# Altium PCB PCB_OPL2 MegaMod_2023-11-26.pcbdoc
Units mil, origin at the board's own origin, x right, y up, seen from the top; angles counter-clockwise.
Board outline 4277 x 4282.82 mil, 2 copper layers (Top Layer, Bottom Layer); 70 components, 60 nets, 220 pads, 2 vias.
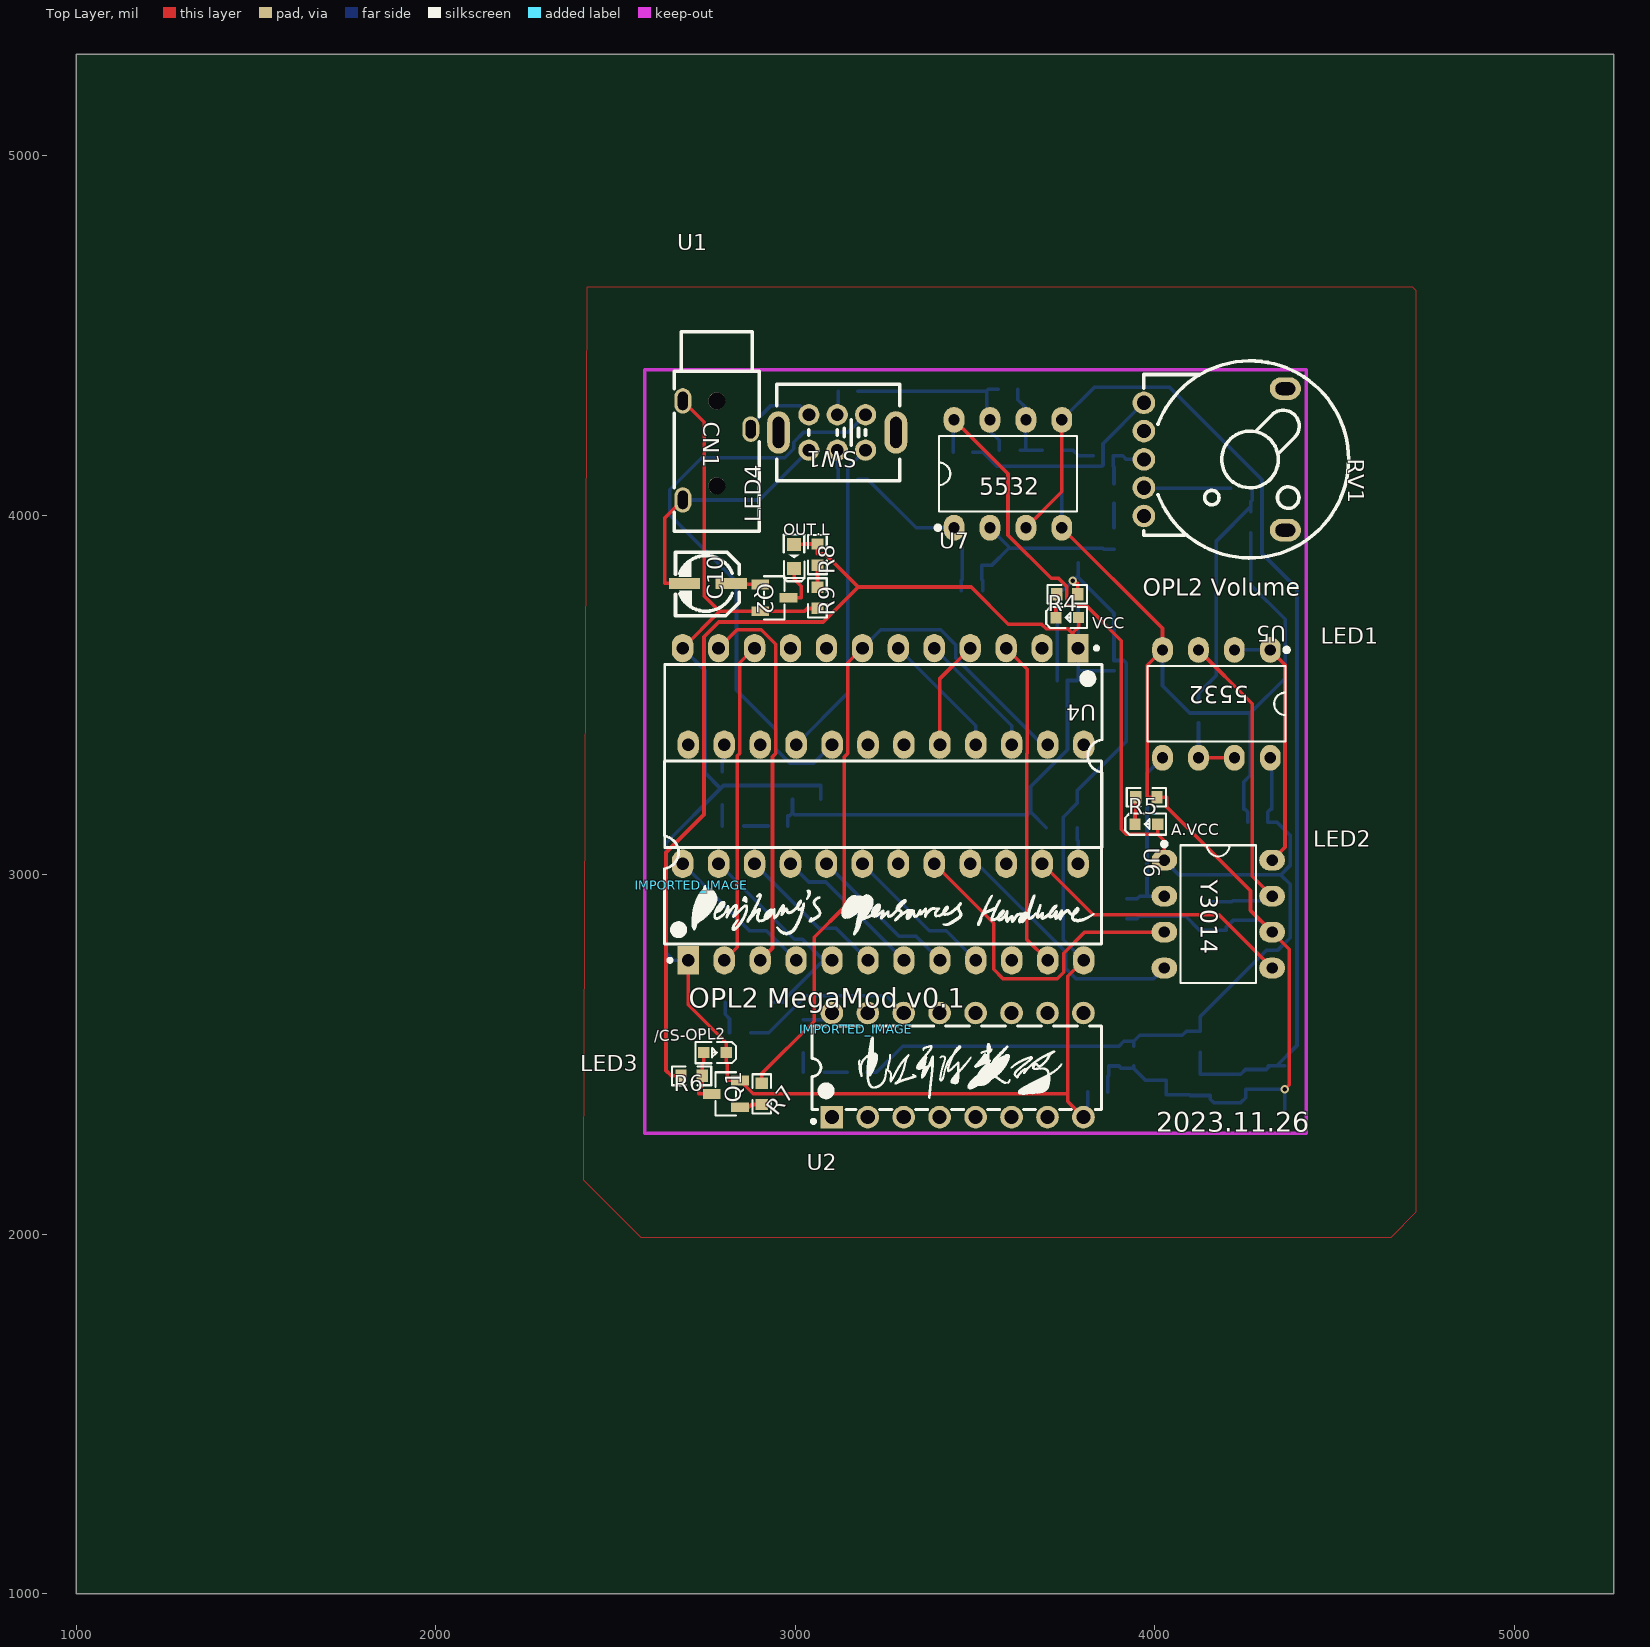
[diagram p0: Top Layer view]
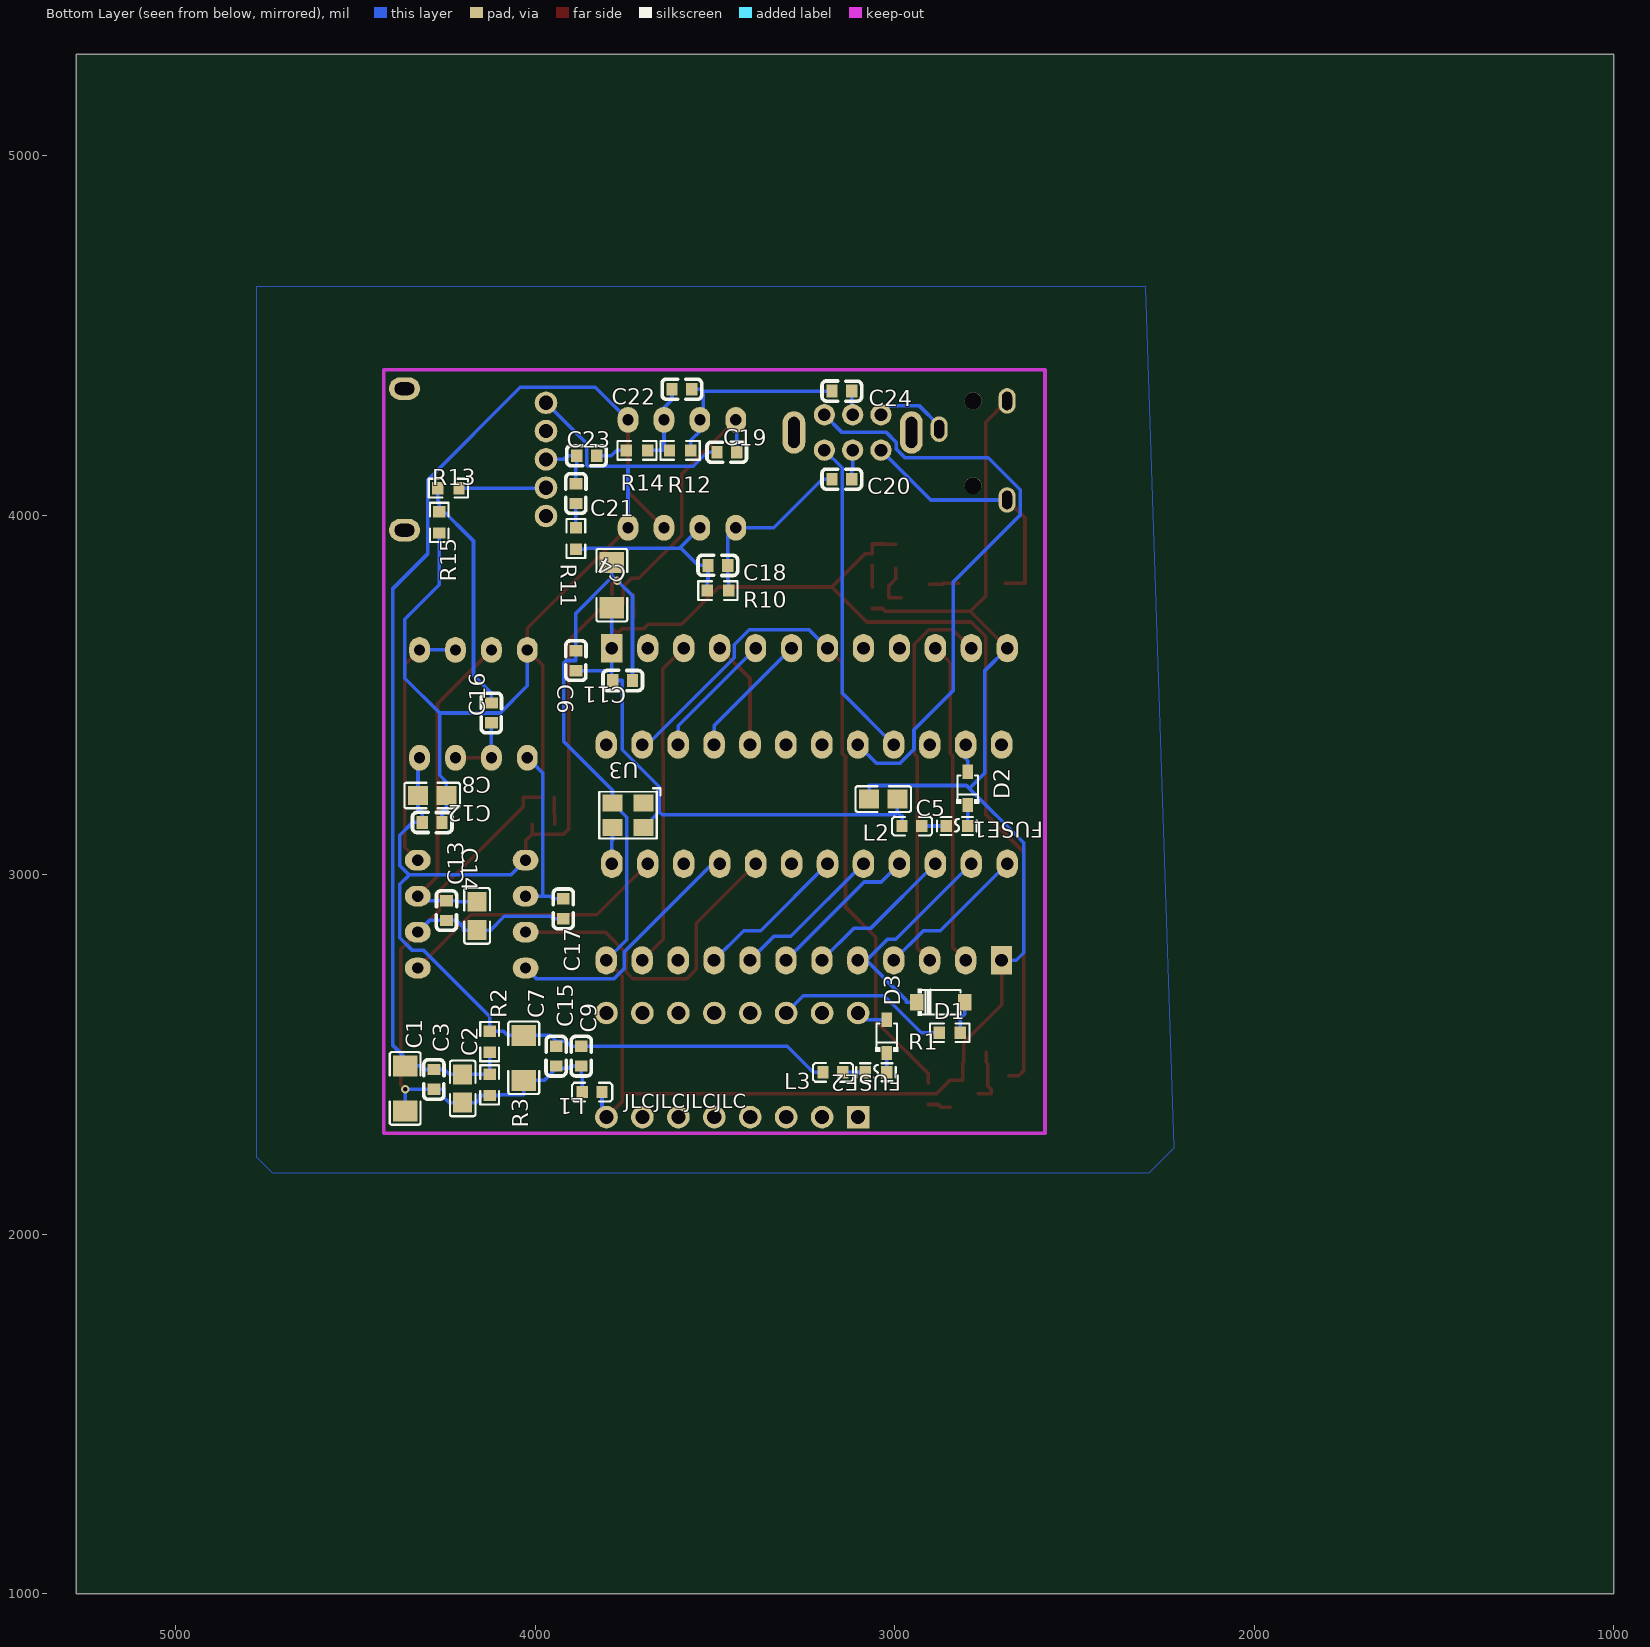
[diagram p1: Bottom Layer view, seen from below]

## Layer stack, top to bottom
Top Layer: signal copper (thickness not stored)
Dielectric: dielectric 12.6, FR-4, Dk 4.8
Bottom Layer: signal copper (thickness not stored)

## Board outline
5277,1000 1000,1000 1000,5282.82 5277,5282.82

## Components (designator, comment, footprint, x,y, rotation, side; value= is the part's Value field where it differs from the comment)
C1 "100u" C1206 4362,2405.72 r270 bottom
C2 "47u" C0805 4202,2405.72 r270 bottom
C3 "1n" C0603 4282,2430.72 r270 bottom
C4 "100u" C1206 3787,3805.72 r90 bottom
C5 "47u" C0805 3032,3210.72 r0 bottom
C6 "1n" C0603 3887,3595.72 r90 bottom
C7 "100u" C1206 4032,2490.72 r270 bottom
C8 "47u" C0805 4287,3220.72 r180 bottom
C9 "1n" C0603 3872,2495.72 r270 bottom
C10 "1u" CAP-D4.0×H5.5 2822,3810.72 r0 top
C11 "0.1u" C0603 3757,3540.72 r180 bottom
C12 "0.1u" C0603 4287,3145.72 r180 bottom
C13 "0.1u" C0603 4247,2900.72 r270 bottom
C14 "10u" C0805 4162,2885.72 r90 bottom
C15 "0.1u" C0603 3942,2495.72 r270 bottom
C16 "4.7u" C0603 4122,3450.72 r270 bottom
C17 "1n" C0603 3922,2905.72 r270 bottom
C18 "120p" C0603 3492,3860.72 r0 bottom
C19 "0.1u" C0603 3467,4175.73 r0 bottom
C20 "4.7u" C0603 3147,4100.73 r0 bottom
C21 "4.7u" C0603 3887,4060.72 r90 bottom
C22 "120p" C0603 3592,4350.73 r0 bottom
C23 "4.7u" C0603 3857,4165.73 r0 bottom
C24 "4.7u" C0603 3147,4345.73 r0 bottom
CN1 "PJ-320" AUDIO-TH_HOOYA_PJ-320 2782,4180.73 r270 top
D1 "1N4148W" SOD-123_L2.8-W1.8-LS3.7-RD 2872,2645.72 r0 bottom
D2 "1N5819WS" SOD-323_L1.8-W1.3-LS2.5-RD 2797,3240.72 r270 bottom
D3 "1N5819WS" SOD-323_L1.8-W1.3-LS2.5-RD 3022,2550.72 r270 bottom
FUSE1 "PPTC0.5A/24V 自恢复保险丝-0603" F0603 2827,3135.72 r180 bottom
FUSE2 "PPTC0.5A/24V 自恢复保险丝-0603" F0603 3052,2450.72 r180 bottom
IMPORTED_IMAGE "IMPORTED_IMAGE" IMPORTED_IMAGE 3169.49,2570.92 r0 top
IMPORTED_IMAGE "IMPORTED_IMAGE" IMPORTED_IMAGE 2712.05,2970.72 r0 top
L1 "100Ω" L0603 3842,2395.72 r180 bottom
L2 "100Ω" L0603 2952,3135.72 r180 bottom
L3 "100Ω" L0603 3172,2450.72 r180 bottom
LED1 "LED0603" LED0603-RD 3757,3715.72 r0 top
LED2 "LED0603" LED0603-RD 3977,3140.72 r0 top
LED3 "LED0603" LED0603-RD 2777,2505.72 r180 top
LED4 "LED-0603_R" LED0603_RED 2997,3885.72 r270 top
Q1 "MMBT3904" SOT-23-3_L2.9-W1.3-P1.90-LS2.4-BR 2807,2390.72 r0 top
Q2 "MMBT3904" SOT-23-3_L2.9-W1.3-P1.90-LS2.4-BR 2942,3770.72 r180 top
R1 "1k" R0603#1 2847,2560.72 r0 bottom
R2 "100k" R0603#1 4127,2535.72 r270 bottom
R3 "100k" R0603#1 4127,2415.72 r270 bottom
R4 "20k" R0603#2 3757,3780.72 r0 top
R5 "20k" R0603#2 3977,3215.72 r0 top
R6 "680r" R0603#2 2712,2440.72 r0 top
R7 "100r" R0603#2 2907,2390.72 r90 top
R8 "10k" R0603#2 3062,3890.72 r90 top
R9 "10k" R0603#2 3062,3770.72 r90 top
R10 "100k" R0603#1 3492,3790.72 r0 bottom
R11 "100k" R0603#1 3887,3935.72 r90 bottom
R12 "100k" R0603#1 3597,4180.73 r0 bottom
R13 "2.2k" R0603#1 4242,4075.72 r0 bottom
R14 "100k" R0603#1 3717,4180.73 r0 bottom
R15 "2.2k" R0603#1 4267,3980.72 r270 bottom
RV1 "圆盘双联电位器10K" RES-TH_RK10J12E002L 4167,4155.73 r270 top
SW1 "SS-22D07" SW-TH_SS-22D07 3117,4230.73 r180 top
U1 "MegaGRRL IC-FM" MEGAGRRL_IC-FM 3231.92,3060.32 r0 top
U2 "MegaGRRL_IC-DCSG" MEGAGRRL_IC-DCSG 3452,2470.72 r0 top
U3 "3.579545MHz" OSC-SMD_4P-L3.2-W2.5-BL 3742,3165.72 r180 bottom
U4 "YM3812-DJ" DIP-24_L31.0-W13.5-P2.54-LS15.2-BL 3237,3330.72 r180 top
U5 "NE5532-DJ" DIP-8-DJ 4172,3475.72 r180 top
U6 "YM3014" DIP-8-DJ 4177,2890.72 r270 top
U7 "NE5532-DJ" DIP-8-DJ 3592,4115.73 r0 top
? "" ? 2649.99,2686.49 r0 top
? "" ? 2103.09,4050 r0 top
? "" ? 2584.57,3688.33 r0 top
? "" ? 2902.67,2132.07 r0 top
? "" ? 2918.25,2112.34 r0 top

## Footprints (in the part's own frame and the unit in brackets; to place one, negate y for a bottom-side part, rotate by r counter-clockwise, add the part's x,y. Pads: shape width x height; smd on the part's side, far side on the other; paste and mask are expansions set on the pad)
AUDIO-TH_HOOYA_PJ-320 [mm]
  oval 1.8x1.2 hole 0.7 slot 1.3 at 0 deg paste+0 mask+0.05: 2(-1.5,2.4) 3(-3.5,-2.4) 4(3.5,-2.4)
  round 1.2 hole 1.2 unplated paste+0: ""(-3.5,0) ""(2.5,0)
  silkscreen extent -8.4,-3.01 5.7,3.01
C0603 [mm]
  rect 0.8x0.9 smd paste+0 mask+0.051: 1(0.7,0) 2(-0.7,0)
  silkscreen extent -1.39,-0.72 1.41,0.71
C0805 [mm]
  rect 1.41x1.35 smd paste-100 mask+0.051: 1(1,0) 2(-1,0)
  silkscreen extent -1.96,-0.9 1.96,0.9
C1206 [mm]
  rect 1.485x1.728 smd paste-100 mask+0.051: 1(1.593,0) 2(-1.593,0)
  silkscreen extent -2.56,-1.09 2.56,1.09
CAP-D4.0×H5.5 [mm]
  rect 2.2x0.8 smd paste+0 mask+0.102: 1(0,0) 2(-3.302,0)
  silkscreen extent -3.94,-2.29 0.56,2.21
DIP-8-DJ [mm]
  oval 1.46x1.825 hole 0.8 paste+0 mask+0.051: 1(-3.81,-3.81) 2(-1.27,-3.81) 3(1.27,-3.81) 4(3.81,-3.81) 5(3.81,3.81) 6(1.27,3.81) 7(-1.27,3.81) 8(-3.81,3.81)
  silkscreen extent -5.1,-3.96 4.87,2.67
DIP-24_L31.0-W13.5-P2.54-LS15.2-BL [mm]
  rect 1.5x2 hole 0.9 paste+0 mask+0.051: 1(-13.97,-7.62)
  oval 1.5x2 hole 0.9 paste+0 mask+0.051: 2(-11.43,-7.62) 3(-8.89,-7.62) 4(-6.35,-7.62) 5(-3.81,-7.62) 6(-1.27,-7.62) 7(1.27,-7.62) 8(3.81,-7.62) 9(6.35,-7.62) 11(11.43,-7.62)
  oval 1.524x2 hole 0.9 paste+0 mask+0.051: 10(8.89,-7.62) 12(13.97,-7.62) 13(13.97,7.62) 14(11.43,7.62) 15(8.89,7.62) 16(6.35,7.62) 17(3.81,7.62) 18(1.27,7.62) 19(-1.27,7.62) 20(-3.81,7.62) 21(-6.35,7.62) 22(-8.89,7.62) 23(-11.43,7.62) 24(-13.97,7.62)
  silkscreen extent -15.66,-7.74 15.24,6.48
F0603 [mil]
  rect 31.75x34.02 smd paste-3937.01 mask+2: 1(29.66,0) 2(-29.66,0)
  silkscreen extent -55,-25 55,25
IMPORTED_IMAGE [mil]
  silkscreen extent 0,-193 583,0
L0603 [mm]
  rect 0.8x0.864 smd paste-100 mask+0.051: 1(0.7,0) 2(-0.7,0)
  silkscreen extent -1.41,-0.67 1.42,0.65
LED0603-RD [mm]
  rect 0.8x0.8 smd paste+0 mask+0.051: 1(-0.799,-0.003) 2(0.799,0.004)
  silkscreen extent -1.49,-0.75 1.39,0.76
LED0603_RED [mm]
  rect 0.9x1 smd paste+0 mask+0.051: 1(-0.85,0) 2(0.85,0)
  silkscreen extent -1.54,-0.73 1.75,0.73
MEGAGRRL_IC-DCSG [mil]
MEGAGRRL_IC-FM [mil]
OSC-SMD_4P-L3.2-W2.5-BL [mm]
  rect 1.4x1.2 smd paste+0 mask+0.051: 1(1.1,0.875) 2(-1.1,0.875) 3(-1.1,-0.875) 4(1.1,-0.875)
  silkscreen extent -2.03,-1.65 2.29,1.9
R0603#1 [mil]
  rect 31.75x34.02 smd paste-3937.01 mask+2: 1(29.66,0) 2(-29.66,0)
  silkscreen extent -55,-26 55,26
R0603#2 [mil]
  rect 31.75x34.02 smd paste-3937.01 mask+2: 1(-29.66,0) 2(29.66,0)
  silkscreen extent -55,-26 55,26
RES-TH_RK10J12E002L [mm]
  round 1.6 hole 1 paste+0 mask+0.051: 1(-4,-5) 2(0,-5) 3(2,-5) 4(-2,-5) 5(4,-5)
  oval 1.6x2.2 hole 0.9 slot 1.4 at 90 deg paste+0 mask+0.051: 6(5,5) 7(-5,5)
  silkscreen extent -6.96,-5 6.96,9.46
SOD-123_L2.8-W1.8-LS3.7-RD [mm]
  rect 0.95x1.15 smd paste+0 mask+0.051: 1(1.693,0) 2(-1.693,0)
  silkscreen extent -1.41,-0.94 1.63,0.94
SOD-323_L1.8-W1.3-LS2.5-RD [mm]
  rect 1x0.75 smd paste+0 mask+0.051: 1(1.173,0) 2(-1.173,0)
  silkscreen extent -0.9,-0.8 1.08,0.8
SOT-23-3_L2.9-W1.3-P1.90-LS2.4-BR [mm]
  rect 1.25x0.7 smd paste+0 mask+0.051: 1(1,-0.95) 2(1,0.95) 3(-1,0)
  silkscreen extent -0.73,-1.53 0.73,1.53
SW-TH_SS-22D07 [mm]
  round 1.5 hole 0.9 paste+0 mask+0.051: 1(-2,1.25) 2(0,1.25) 3(2,1.25) 4(-2,-1.25) 5(0,-1.25) 6(2,-1.25)
  oval 1.6x3 hole 0.8 slot 2.2 at 90 deg paste+0 mask+0.051: 7(4.15,0) 8(-4.15,0)
  silkscreen extent -4.43,-3.4 4.27,3.4
? [mil]

## Free pads (board coordinates)
  rect 59.05x78.74 hole 35.43 paste+0 mask+2: 1(2702.67,2762.14)
  rect 62.99x62.99 hole 39.37 paste+0 mask+2: 1(3102,2325.85)
  oval 59.05x78.74 hole 35.43 paste+0 mask+2: 2(2802.67,2762.14) 3(2902.67,2762.14) 4(3002.67,2762.14) 5(3102.67,2762.14) 6(3202.67,2762.14) 7(3302.67,2762.14) 8(3402.67,2762.14) 9(3502.67,2762.14) 11(3702.67,2762.14)
  round 62.99 hole 39.37 paste+0 mask+2: 2(3202,2325.85) 3(3302,2325.85) 4(3402,2325.85) 5(3502,2325.85) 6(3602,2325.85) 7(3702,2325.85) 8(3802,2325.85) 9(3802,2615.61) 10(3702,2615.61) 11(3602,2615.61) 12(3502,2615.61) 13(3402,2615.61) 14(3302,2615.61) 15(3202,2615.61) 16(3102,2615.61)
  oval 60x78.74 hole 35.43 paste+0 mask+2: 10(3602.67,2762.14) 12(3802.67,2762.14) 13(3802.67,3362.14) 14(3702.67,3362.14) 15(3602.67,3362.14) 16(3502.67,3362.14) 17(3402.67,3362.14) 18(3302.67,3362.14) 19(3202.67,3362.14) 20(3102.67,3362.14) 21(3002.67,3362.14) 22(2902.67,3362.14) 23(2802.67,3362.14) 24(2702.67,3362.14)

## Via types
v1: diameter 24.02, hole 12.01, Top Layer to Bottom Layer, tented both sides, 2 vias

## Nets (pads, with @x,y where several pads share a name; then routed paths per layer and width w, separated by ;. In a path a pad name is that pad's centre, name@x,y a point inside that pad or via, vN(x,y) a via of type N, cw(c..) or ccw(c..) an arc to the next point about the centre after c; other vN are vias at no path point)
/CS: pad.14@3702.67,3362.14 R7.2 U4.7 | length 2017.1
  Top Layer w10: R7.2 2907,2447.41 3052.67,2593.07 3052.67,2826.05 3137,2910.39 3137,3328.82 3145.94,3337.76 3145.94,3589.66 U4.7
  Bottom Layer w10: U4.7 3238.32,3682.05 3404.63,3682.05 3446.26,3640.41 3446.26,3604.01 3688.14,3362.14 pad.14@3702.67,3362.14
/IC: pad.11@3702.67,2762.14 U4.3 | length 918.3
  Top Layer w10: U4.3 3645.94,3571.78 3645.94,3337.76 3643.73,3335.55 3643.73,2821.07 pad.11@3702.67,2762.14
/RD: pad.16@3502.67,3362.14 U4.6 | length 357.9
  Bottom Layer w10: U4.6 3502.67,3415.05 pad.16@3502.67,3362.14
/WR: pad.15@3602.67,3362.14 U4.5 | length 357.9
  Bottom Layer w10: U4.5 3602.67,3415.05 pad.15@3602.67,3362.14
A0: pad.17 U4.4 | length 303.5
  Top Layer w10: pad.17 3402.67,3546.39 U4.4
A.GND: C1.1 C2.1 C3.1 C7.1 C8.1 C9.1 C12.1 C13.1 C14.2 C15.1 C17.1 C19.1 L1.2 R3.1 R5.2 R15.1 RV1.1 U5.4 U6.6 U7.4 | length 5126.5
  Top Layer w10: U7.4 4022,3685.72 U5.4 3979.63,3583.36 3979.63,3215.72 R5.2 4033.68,3215.72 4033.68,3188.7 4266.8,2955.59 4266.8,2900.93 U6.6 4374.6,2793.12 4374.6,2415.76 v1(4362,2403.16)
  Bottom Layer w10: C19.1 3521.46,4175.73 3560.39,4136.8 3742,4136.8 ; U7.4 3742,4136.8 ; L1.2 3869.56,2438.82 3872,2441.26 C9.1 3900.87,2468.16 3907.59,2461.45 C15.1@3942,2461.45 ; C17.1 3950.87,2878.16 3957.15,2884.45 4086.19,2884.45 4124.28,2846.36 C14.2 4199.73,2846.36 4199.73,2854.76 4218.13,2873.16 C13.1 4294.56,2873.16 U6.6 ; C15.1 C15.1@3942,2461.45 ; RV1.1 3856.4,4199.45 3856.4,4139.7 3853.49,4136.8 3742,4136.8 ; U5.4 4022,3525.88 4097.75,3450.12 4265.91,3450.12 ; C12.1 4259.44,3160.16 4259.44,3174.59 4251.03,3183.01 4247.63,3183.01 C8.1 4247.63,3258.45 4265.91,3276.74 4265.91,3450.12 ; R15.1 4267,3807.34 4363.05,3711.3 4363.05,3547.26 4265.91,3450.12 ; C1.1 4362,2383.41 v1(4362,2403.16) 4310.87,2403.16 C3.1 4253.13,2403.16 4253.13,2379.76 4239.73,2366.36 C2.1 4164.28,2366.36 4155.16,2375.47 4155.16,2386.07 R3.1 4098.84,2386.07 4097.26,2387.64 4032,2387.64 4032,2407.84 C7.1 3975.42,2428.03 C15.1@3942,2461.45
A.VCC: C7.2 C8.2 C9.2 C12.2 C15.2 C19.2 L3.2 LED2.2 R2.2 U5.8 U6.1 U7.8 | length 3961.7
  Top Layer w10: U7.8 3592,4115.73 3592,3944.97 3712.02,3824.95 3732.53,3824.95 3755.4,3802.07 3755.4,3752.66 3760.39,3747.66 3810.78,3747.66 3907.39,3651.05 3907.39,3127.18 3921.55,3113.03 4008.48,3113.03 ; LED2.2 4008.48,3113.97 4008.48,3113.03 ; U6.1 4027,3094.51 4008.48,3113.03
  Bottom Layer w10: L3.2 3226.46,2450.72 3299.02,2523.28 C9.2 3900.87,2523.28 3914.32,2536.74 C15.2@3942,2536.74 ; C19.2 3439.44,4263.16 U7.8 ; C15.2 C15.2@3942,2536.74 ; U6.1 4067.94,2999.78 4350.8,2999.78 ; U5.8 4326.37,3321.36 C8.2 4326.37,3183.01 4322.97,3183.01 4314.56,3174.59 C12.2 4341.46,3145.72 4376.87,3110.32 4376.87,3025.86 4350.8,2999.78 ; C15.2@3942,2536.74 3958.69,2553.43 C7.2 4077.17,2553.43 4089.13,2565.39 R2.2 4127,2605.68 4312.05,2790.72 4343.01,2790.72 4376.95,2824.66 4376.95,2973.64 4350.8,2999.78
A.VCC_IN: D3.2 pad.16@3102,2615.61 | length 87.7
  Bottom Layer w10: D3.2 3083.29,2596.89 pad.16@3102,2615.61
C20_1: C18.2 C20.1 R10.2 U7.1 | length 508.5
  Bottom Layer w10: C20.1 3201.46,4100.73 3336.46,3965.72 U7.1 3464.44,3943.28 C18.2 3464.44,3820.99 3462.34,3818.89 R10.2
C24_1: C22.2 C24.1 R12.2 U7.7 | length 571.4
  Bottom Layer w10: C24.1 3532.54,4345.73 ; C22.2 3537.54,4350.73 3532.54,4345.73 ; R12.2 3567.34,4208.89 3542,4234.23 U7.7 3532.54,4275.19 3532.54,4345.73
D0: pad.2@2802.67,2762.14 U4.10 | length 903.5
  Top Layer w10: pad.2@2802.67,2762.14 2839.06,2798.53 2839.06,3330.88 2845.94,3337.76 2845.94,3589.66 U4.10
D1: pad.3@2902.67,2762.14 U4.11 | length 1094.4
  Top Layer w10: U4.11 2838.31,3682.03 2905.66,3682.03 2945.94,3641.76 2945.94,3337.76 2937,3328.82 2937,2796.47 pad.3@2902.67,2762.14
D1_2: D1.2 R1.2 | length 90
  Bottom Layer w10: D1.2 2805.37,2611.93 2817.34,2599.97 R1.2
D2: pad.4@3002.67,2762.14 U4.13 | length 426.9
  Bottom Layer w10: U4.13 2872.97,2844.76 2920.05,2844.76 pad.4@3002.67,2762.14
D2_1: D2.1 FUSE1.1 | length 59
  Bottom Layer w10: D2.1 2797,3164.22 2797.34,3163.89 FUSE1.1
D3: D1.1 pad.5@3102.67,2762.14 U4.14 | length 618.8
  Bottom Layer w10: U4.14 2997.25,2820.47 3020.26,2820.47 pad.5@3078.73,2762.01 ; D1.1 2968.48,2645.72 2968.48,2651.76 pad.5@3078.73,2762.01 ; pad.5@3102.67,2762.14 3078.85,2762.14 pad.5@3078.73,2762.01
D3_1: D3.1 FUSE2.1 | length 54
  Bottom Layer w10: D3.1 3022,2479.22 3022.34,2478.89 FUSE2.1
D4: pad.6@3202.67,2762.14 U4.15 | length 426.9
  Bottom Layer w10: U4.15 3065.9,2851.82 3112.98,2851.82 pad.6@3202.67,2762.14
D5: pad.7@3302.67,2762.14 U4.16 | length 426.9
  Bottom Layer w10: U4.16 3037.57,2980.16 3084.65,2980.16 pad.7@3302.67,2762.14
D6: pad.8@3402.67,2762.14 U4.17 | length 426.9
  Bottom Layer w10: U4.17 3289.03,2828.7 3336.11,2828.7 pad.8@3402.67,2762.14
D7: pad.9@3502.67,2762.14 U4.18 | length 426.9
  Bottom Layer w10: U4.18 3372.97,2844.76 3420.05,2844.76 pad.9@3502.67,2762.14
GND: C4.1 C5.1 C6.1 C11.1 CN1.3 L1.1 LED3.1 pad.1@2702.67,2762.14 pad.8@3802,2325.85 pad.12@3802.67,2762.14 Q1.2 Q2.2 R4.2 R9.1 U3.2 U4.12 | length 5918.6
  Top Layer w10: U4.12 2789.6,3733.32 ; CN1.3 2747.17,4258.85 2747.17,3775.76 2789.6,3733.32 ; pad.1@2702.67,2762.14 2702.67,2638.57 2808.48,2532.76 LED3.1 2808.48,2478.97 2810.61,2476.84 2810.61,2428.12 Q1.2 2883.77,2390.72 3758.27,2390.72 ; R9.1 3033.84,3741.07 3026.1,3733.32 Q2.2 2789.6,3733.32 ; v1(3771.86,3818.47) 3771.28,3817.89 3777.65,3817.89 3786.66,3808.89 R4.2 ; pad.8@3802,2325.84 3758.27,2369.57 3758.27,2390.72 ; pad.12@3802.67,2762.14 3802.67,2761.93 3758.27,2717.53 3758.27,2390.72
  Bottom Layer w10: U4.12 2749.05,3568.68 2749.05,3283.72 2792.42,3240.36 ; pad.1@2702.67,2762.14 2662,2762.14 2641.26,2782.88 2641.26,3089.2 2792.42,3240.36 ; C5.1 3071.37,3248.45 3071.31,3248.51 2800.58,3248.51 2792.42,3240.36 ; C11.1 3729.44,3569.59 3729.44,3776.05 v1(3771.86,3818.47) 3781.43,3828.05 3787,3828.05 ; C4.1 3787,3828.05 ; pad.8@3802,2325.84 3814.45,2338.3 L1.1 ; pad.12@3802.67,2762.14 3745.64,2819.16 3745.64,3160.49 U3.2 3785.31,3234.93 3921.16,3370.78 3921.16,3589.12 3913.9,3596.39 3887,3596.39 C6.1 3887,3728.05 3787,3828.05
IN.FM-L: pad.21 SW1.1 | length 899.4
  Bottom Layer w10: pad.21 3146.25,3505.72 3146.25,4078.22 3146.4,4078.36 3146.4,4132.18 SW1.1
IN.FM-R: pad.20 SW1.4 | length 1679.7
  Bottom Layer w10: pad.20 3051.51,3310.97 2984.89,3310.97 2946.41,3349.45 2946.41,3403.8 2836.77,3513.43 2836.77,3815.07 2650.81,4001.03 2650.81,4071.09 2740.2,4160.48 2971.31,4160.48 2996.32,4185.49 2996.32,4203.88 3023.17,4230.73 3146.52,4230.73 SW1.4
L2_1: FUSE1.2 L2.1 | length 67.8
  Bottom Layer w10: FUSE1.2 L2.1
L3_1: FUSE2.2 L3.1 | length 62.8
  Bottom Layer w10: FUSE2.2 L3.1
LED2_1: LED2.1 R5.1 | length 75.9
  Top Layer w10: LED2.1 3945.53,3167.49 3947.34,3169.3 R5.1
LED3_2: LED3.2 Q1.3 R6.2 | length 156.3
  Top Layer w10: LED3.2 2745.53,2478.68 2741.66,2474.82 R6.2 2741.66,2412.57 2731.87,2402.78 2731.87,2390.72 Q1.3
MCLK_OPL2: U3.3 U4.24 | length 101.2
  Bottom Layer w10: U3.3 3785.31,3096.49 3787,3094.8 U4.24
MIX.L: C18.1 R10.1 R11.2 U7.2 | length 538.1
  Bottom Layer w10: R10.1 3521.66,3818.89 3519.56,3820.99 C18.1 3546.46,3860.72 3594.6,3908.86 ; U7.2 3594.6,3913.12 3594.6,3908.86 ; R11.2 3858.84,3906.07 3856.04,3908.86 3594.6,3908.86
MIX.R: C22.1 R12.1 R14.2 U7.6 | length 240
  Bottom Layer w10: C22.1 3619.56,4321.85 3642,4299.41 U7.6 R12.1@3642,4180.73 ; R12.1 R12.1@3642,4180.73 ; R14.2 R12.1@3642,4180.73
MO: U4.21 U6.4 | length 711.3
  Bottom Layer w10: U4.21 3506.93,3030.72 3752.43,2785.22 3752.43,2739.28 3780.29,2711.43 3997.7,2711.43 U6.4
MP: U5.1 U5.2 U6.8 | length 716.8
  Top Layer w10: U5.1 4362.85,3584.88 4362.85,3076.57 U6.8
  Bottom Layer w10: U5.2 U5.1
OPL: C16.2 R13.1 R15.2 | length 672.9
  Bottom Layer w10: C16.2 4122,3505.18 4172,3555.18 4172,3928.89 R15.2@4267,4023.89 ; R15.2 R15.2@4267,4023.89 ; R13.1 4271.66,4042.07 4267,4037.41 R15.2@4267,4023.89
OUT.L: C10.2 CN1.4 SW1.3 | length 715.5
  Top Layer w10: CN1.4 2637.54,3992.95 2637.54,3810.72 C10.2
  Bottom Layer w10: CN1.4 2899.67,4042.93 SW1.3
OUT.R: CN1.2 SW1.6 | length 205.3
  Bottom Layer w10: CN1.2 2876.49,4249.49 2932.56,4305.56 3012.64,4305.56 SW1.6
PHIS: U4.23 U6.5 | length 760.1
  Top Layer w10: U4.23 3829.13,2888.59 4179.13,2888.59 U6.5
Q1_1: Q1.1 R7.1 | length 63.8
  Top Layer w10: Q1.1 2871.1,2353.32 2878.84,2361.07 R7.1
Q2_1: C10.1 Q2.1 | length 81.7
  Top Layer w10: C10.1 2864.27,3810.72 2866.87,3808.12 Q2.1
Q2_3: LED4.2 Q2.3 | length 125.6
  Top Layer w10: Q2.3 3017.13,3770.72 3017.13,3803.28 2997,3823.41 LED4.2
R1_1: pad.14@3302,2615.61 R1.1 | length 487.7
  Bottom Layer w10: R1.1 2926.62,2560.72 3029.36,2663.47 3254.14,2663.47 pad.14@3302,2615.61
R4_1: LED1.1 R4.1 | length 65.9
  Top Layer w10: LED1.1 3725.52,3742.49 3727.34,3744.32 R4.1
R8_1: R8.1 R9.2 | length 60.7
  Top Layer w10: R9.2 R8.1
R11_1: C21.2 R11.1 | length 67.8
  Bottom Layer w10: R11.1 C21.2
R14_1: C23.2 R14.1 | length 89
  Bottom Layer w10: R14.1 3773.68,4180.73 3788.68,4165.73 C23.2
RB: C13.2 C14.1 U5.3 U6.7 | length 941.4
  Top Layer w10: U5.3 4272,3475.72 4272,2995.72 U6.7
  Bottom Layer w10: C14.1 4214.94,2925.09 4218.13,2928.28 C13.2 4314.56,2928.28 U6.7
RV1_2: C21.1 C23.1 RV1.2 | length 168.2
  Bottom Layer w10: C21.1 3887,4134.41 3884.56,4136.85 C23.1 3911.46,4165.73 3921.46,4155.73 RV1.2
RV1_3: R13.2 RV1.3 | length 242.7
  Bottom Layer w10: RV1.3 3971.41,4075.72 R13.2
S$15091: 
S$15099: 
S$26913: 
S$26917: 
SH: U4.20 U6.3 | length 932.1
  Top Layer w10: U4.20 3552.43,2865.3 3552.43,2736.93 3578.1,2711.26 3729.08,2711.26 3746.78,2728.95 3746.78,2781.7 3805.8,2840.72 U6.3
SW1_2: C20.2 SW1.2 | length 81.8
  Bottom Layer w10: SW1.2 3117,4132.03 3119.44,4129.6 C20.2
SW1_5: C24.2 SW1.5 | length 66.8
  Bottom Layer w10: SW1.5 3119.44,4282.39 C24.2
TOBUF: C17.2 U5.5 U6.2 | length 511
  Bottom Layer w10: C17.2 3950.87,2933.28 3958.31,2940.72 3978.8,2940.72 ; U5.5 3978.8,3282.53 3978.8,2940.72 ; U6.2 3978.8,2940.72
U5_7: C16.1 U5.6 U5.7 | length 197.4
  Top Layer w10: U5.6 U5.7
  Bottom Layer w10: U5.6 C16.1
VBIAS: C1.2 C2.2 C3.2 R2.1 R3.2 U7.3 U7.5 | length 3045
  Top Layer w10: U7.3 3742,4065.72 U7.5
  Bottom Layer w10: U7.5 3832.82,4356.55 4041.56,4356.55 4298.74,4099.36 4298.74,3893.86 4396.12,3796.49 4396.12,2525.12 C1.2@4339.42,2468.43 ; R2.1 R3.2 4163.99,2445.39 4164.28,2445.09 C2.2 4239.73,2445.09 4252.92,2458.28 C3.2 4310.87,2458.28 4316.83,2464.24 4316.83,2468.43 C1.2@4339.42,2468.43 ; C1.2 C1.2@4339.42,2468.43
VCC: C4.2 C5.2 C6.2 C11.2 L2.2 LED1.2 LED4.1 R6.1 R8.2 U3.4 U4.1 | length 4328.2
  Top Layer w10: R6.1 2655.32,2440.72 2640.63,2455.41 2640.63,3062.24 2746.26,3167.88 2746.26,3662.26 2787.3,3703.3 3077.96,3703.3 3175.42,3800.76 ; LED4.1 3027.84,3919.2 3029.03,3920.39 R8.2 3062,3893.36 3082.82,3893.36 3175.42,3800.76 ; U4.1 3787,3655.99 3771.25,3671.74 ; LED1.2 3788.48,3688.97 3771.25,3671.74 ; 3175.42,3800.76 3489.45,3800.76 3592.84,3697.36 3685.54,3697.36 3698.72,3684.18 3758.8,3684.18 3771.25,3671.74
  Bottom Layer w10: L2.2 2979.56,3163.88 2983.5,3163.88 2992.63,3173.01 ; C5.2 2992.63,3173.01 ; U3.4 3654.78,3175.18 ; C4.2 U4.1 3787,3580.2 3787,3568.16 ; C6.2 3858.13,3568.16 3787,3568.16 ; 2992.63,3173.01 2998.25,3167.39 3646.99,3167.39 3654.78,3175.18 ; 3654.78,3175.18 3654.78,3245.22 3757.66,3348.09 3757.66,3540.72 C11.2 3787,3543.16 3787,3568.16
VCC_IN: D2.2 pad.23 | length 77.6
  Bottom Layer w10: D2.2 2797,3317.72 2802.67,3323.39 pad.23
pads on no net: CN1. RV1.4 RV1.5 RV1.6 RV1.7 SW1.7 SW1.8 U3.1 U4.2 U4.8 U4.9 U4.19 U4.22

## Polygon pours and split planes (outlines as drawn)
A.GND on Bottom Layer (solid): 2302,4635.73 4777,4635.73 4777,2215.72 4732,2170.72 2292,2170.72 2222,2240.72
GND on Top Layer (solid): 2422,4635.73 4717,4635.73 4727,4625.73 4727,2060.72 4657,1990.72 2572,1990.72 2412,2150.72

## Silkscreen, mask and mechanical layers (free items; w line width, h text height)
Top Overlay:
  lines w7.87: 2636.14,3107.81 2636.14,3317.14 3652.67,3317.14 3852.67,3317.14 3852.67,3107.81 3852.67,3017.14 3852.67,2807.81 3652.67,2807.81 2636.14,2807.81 2636.14,3017.14 ccw(c2629.9,3062.49) 2636.17,3107.84 ; 3062.71,2347.49 3046.49,2347.49 3046.49,2439.03 ccw(c3046.5,2464.03) 3046.5,2489.03 3046.49,2579.78 3085.42,2579.78 ; 3118.58,2579.78 3185.42,2579.78 ; 3141.29,2347.49 3168.94,2347.49 ; 3218.58,2579.78 3285.42,2579.78 ; 3235.06,2347.49 3268.94,2347.49 ; 3318.58,2579.78 3385.42,2579.78 ; 3335.06,2347.49 3368.94,2347.49 ; 3418.58,2579.78 3485.42,2579.78 ; 3435.06,2347.49 3468.94,2347.49 ; 3518.58,2579.78 3585.42,2579.78 ; 3535.06,2347.49 3568.94,2347.49 ; 3618.58,2579.78 3685.42,2579.78 ; 3635.06,2347.49 3668.94,2347.49 ; 3718.58,2579.78 3785.42,2579.78 ; 3735.06,2347.49 3768.94,2347.49 ; 3818.58,2579.78 3852,2579.78 3852,2347.49 3835.06,2347.49
  lines w9.84: 2646.57,2762.14 ccw(c2651.49,2762.19) 2646.57,2762.24 ; 3045.9,2314.03 ccw(c3050.82,2314.09) 3045.9,2314.14
  lines w23.62: 2663.67,2847.14 ccw(c2675.48,2847.24) 2663.67,2847.34 ; 3074,2399.04 ccw(c3085.81,2399.14) 3074,2399.23
  text "5532" at 3512,4057.1 h47.24
  text "OUT.L" at 2967,3944.98 h31.5
  text "OPL2 Volume" at 3967,3777.1 h47.24
  text "VCC" at 3826.49,3684.53 h31.5
  text "5532" at 4262,3524.35 h47.24 r180
  text "A.VCC" at 4046.49,3109.53 h31.5
  text "Y3014" at 4128.38,2985.72 h47.24 r270
  text "OPL2 MegaMod v0.1" at 2703.95,2630.5 h55.12
  text "/CS-OPL2" at 2607.55,2534.99 h31.5 r2
  text "2023.11.26" at 4003.95,2285.5 h55.12
Bottom Overlay:
  text "JLCJLCJLCJLC" at 3752,2351.04 h39.37